# Altium PCB mb997.PcbDoc (part 1 of 4)
Units mil, origin at the board's own origin, x right, y up, seen from the top; angles counter-clockwise.
Board outline 2598.43 x 3818.9 mil, 2 copper layers (Top, Bottom), stack 62.402 mil thick; 189 components, 183 nets, 746 pads, 491 vias.
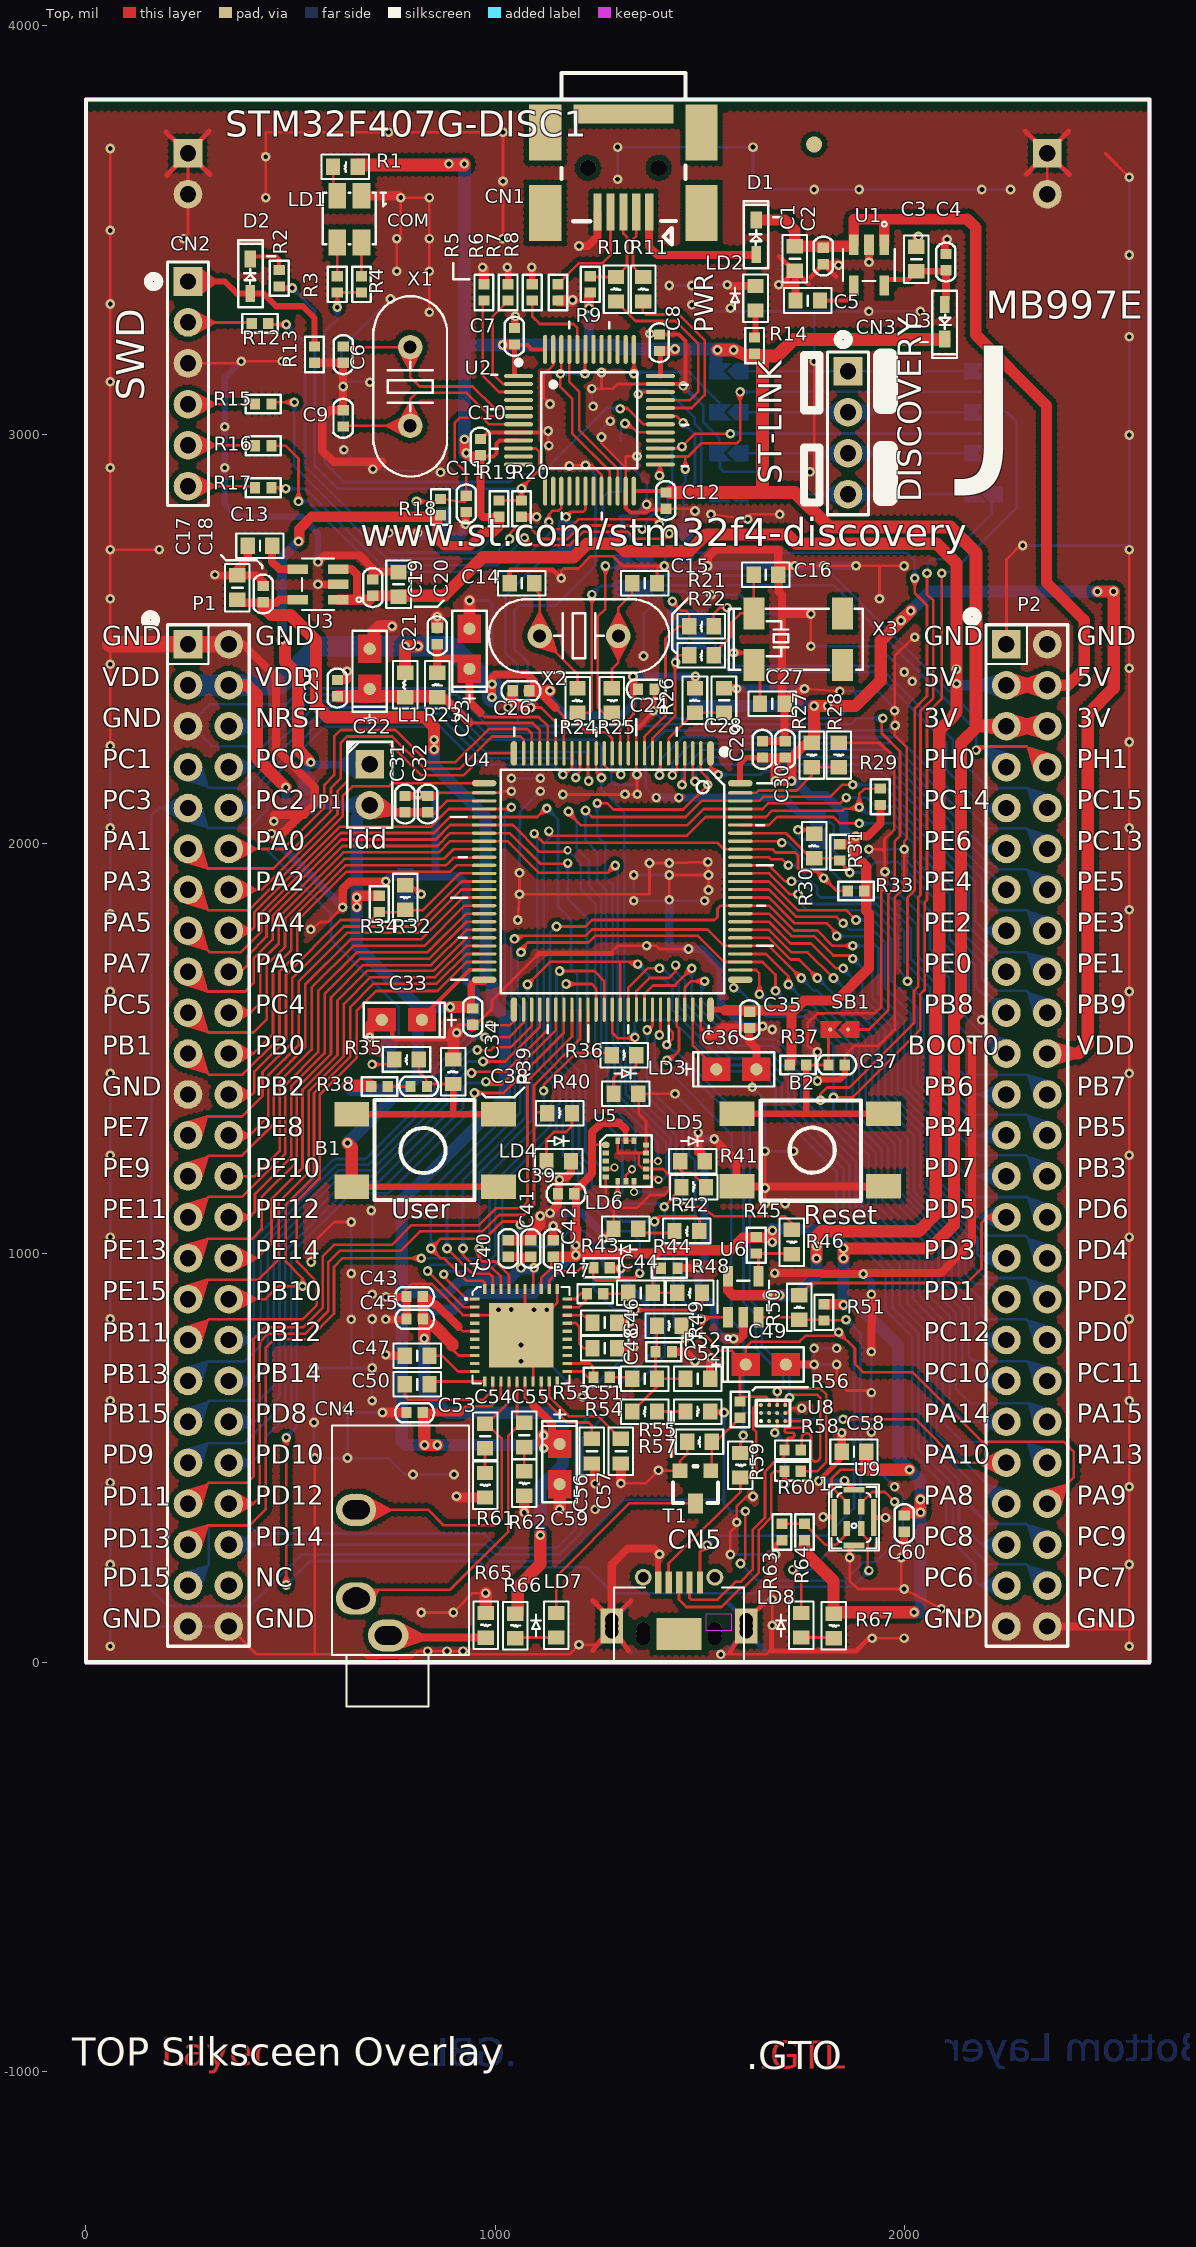
[diagram p0: Top view]
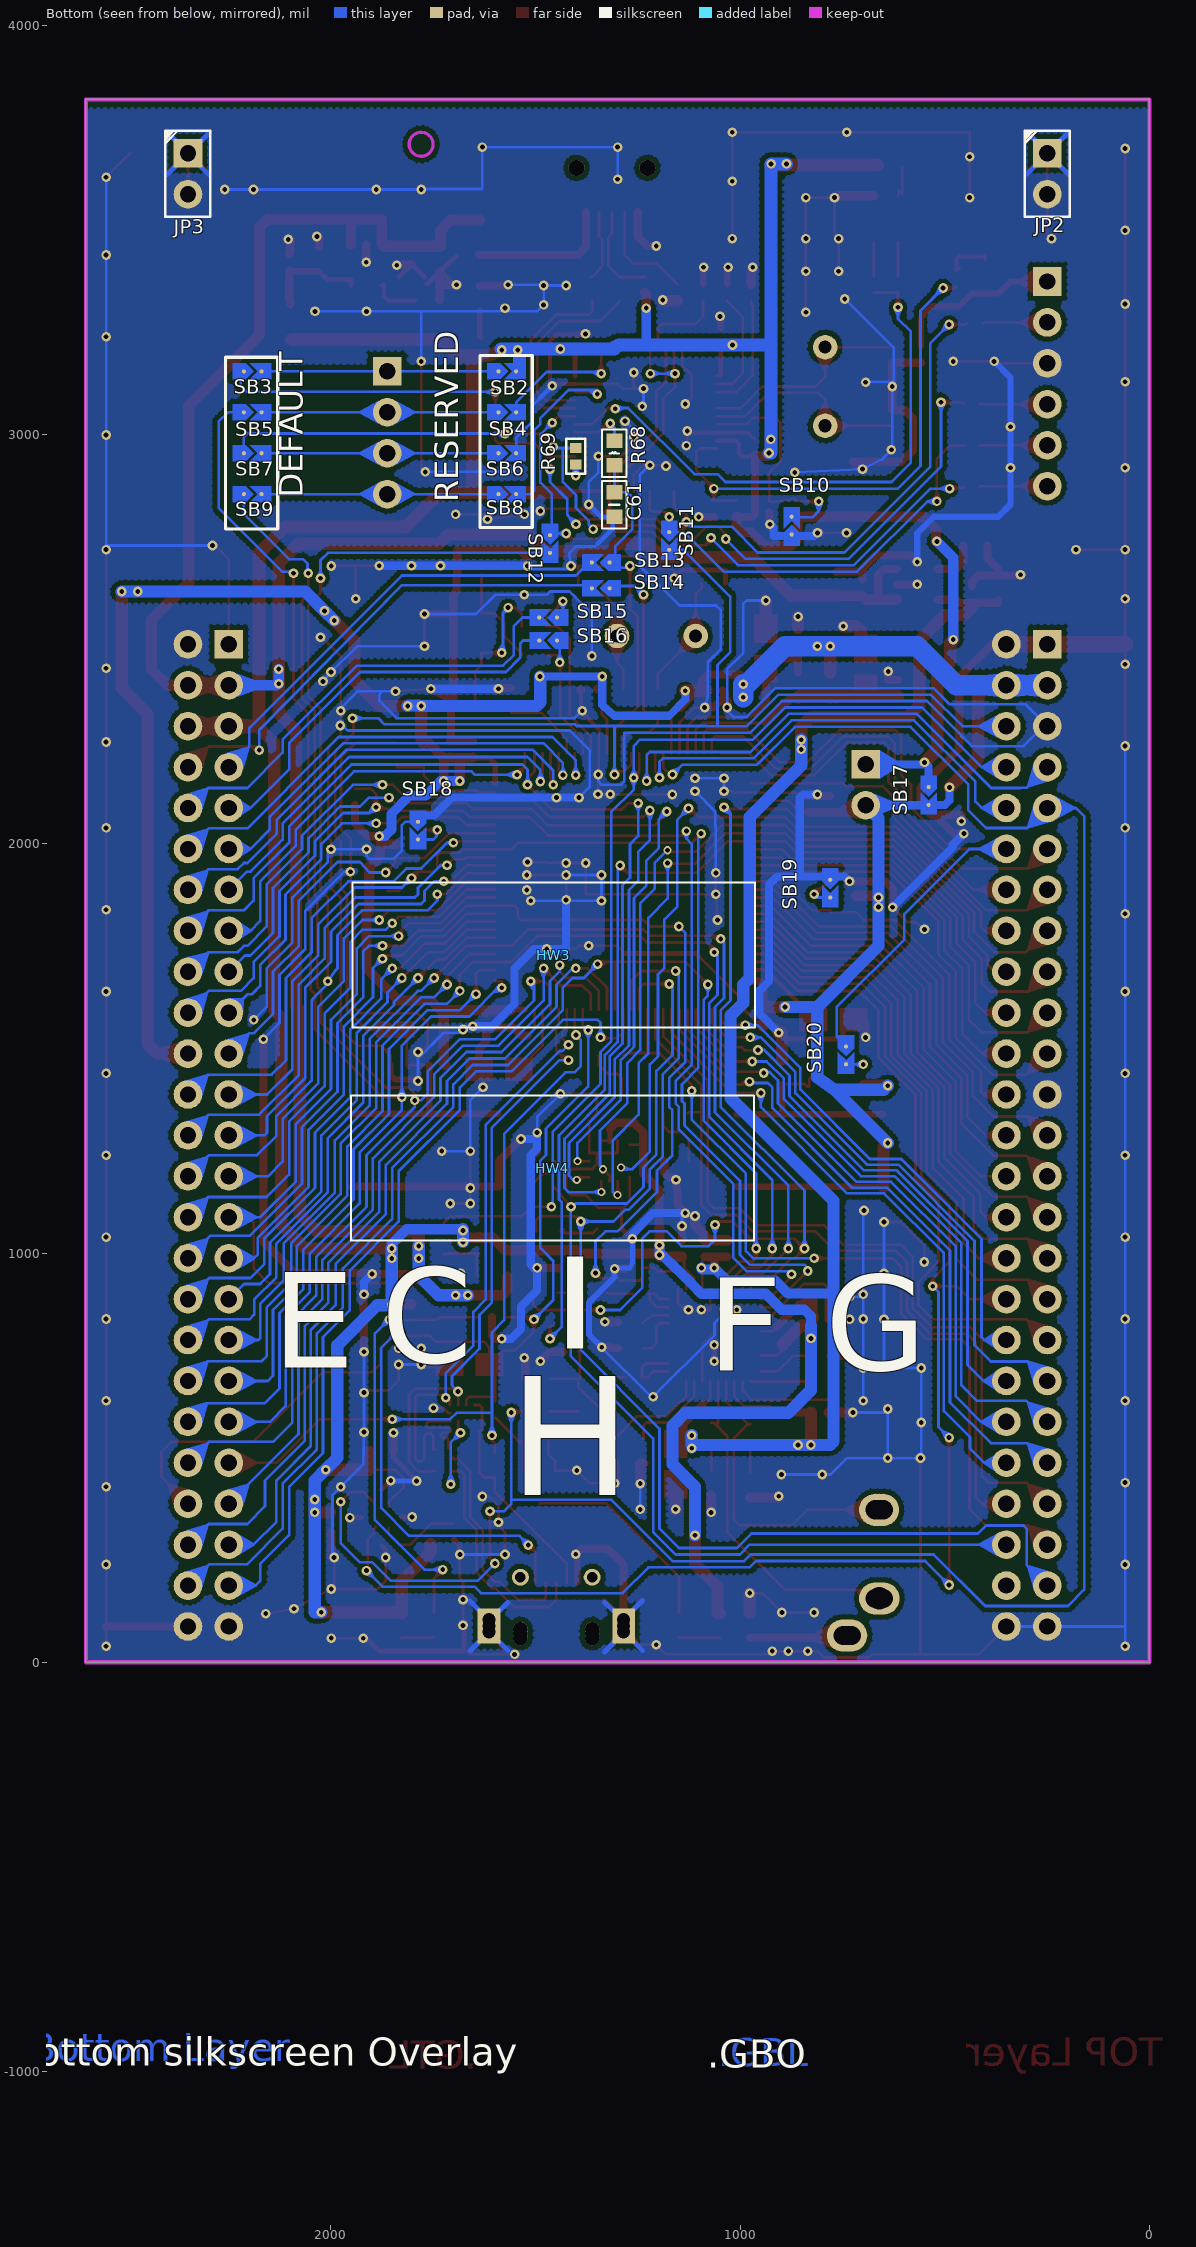
[diagram p1: Bottom view, seen from below]

## Layer stack, top to bottom
Solder Mask Top: solder mask 0.7874, Solder Resist, Dk 3.5
Top: signal copper 0.689
Dielectric 1: dielectric 61.0236, FR-4, Dk 4.2
Bottom: signal copper 0.689
Solder Mask Bottom: solder mask 0.7874, Solder Resist, Dk 3.5

## Board outline
0,0 2598.43,0 2598.43,3818.9 0,3818.9

## Design rules (kind name [scope] priority, off if disabled: settings)
Clearance Clearance_U5 [IsPad vs IsTrack] p1: gap=6 ignorepadtopadclearanceinfootprint=TRUE except(4.72: Arc-SMDPad Track-SMDPad; 10: Text-Text; 12: Arc-Fill Arc-Poly Arc-Region Track-Fill Track-Poly Track-Region SMDPad-Fill SMDPad-Poly SMDPad-Region THPad-Fill THPad-Poly THPad-Region Via-Fill Via-Poly Via-Region Fill-Fill Fill-Poly Fill-Region Poly-Poly Poly-Region Region-Region)
Clearance Clearance_CN5 [IsPad and ((Name = 'CN5-6') or (Name = 'CN5-6/2') or (Name = 'CN5-6/3') or (Name = 'CN5-6/4') or (Name = 'CN5-6/5') or (Name = 'CN5-6/6') or (Name = 'CN1-6') or (Name = 'CN1-7'))] p2: gap=6 ignorepadtopadclearanceinfootprint=TRUE except(5.98: Arc-Fill Arc-Poly Arc-Region Track-Fill Track-Poly Track-Region SMDPad-Fill SMDPad-Poly SMDPad-Region THPad-Fill THPad-Poly THPad-Region Via-Fill Via-Poly Via-Region Fill-Fill Fill-Poly Fill-Region Poly-Poly Poly-Region Region-Region; 10: Text-Text)
Clearance Clearance_JUMPER [HasFootprint('JUMPER') vs (HasFootprint('JUMPER') or IsTrack) and not InPolygon] p3: gap=6 ignorepadtopadclearanceinfootprint=FALSE except(5.91: Arc-Fill Arc-Poly Arc-Region Track-Fill Track-Poly Track-Region SMDPad-Fill SMDPad-Poly SMDPad-Region THPad-Fill THPad-Poly THPad-Region Via-Fill Via-Poly Via-Region Fill-Fill Fill-Poly Fill-Region Poly-Poly Poly-Region Region-Region; 10: Text-Text)
Clearance "Clearance - Default - DEFAULT- SMD" [IsVia vs IsSMTPin] p4 off: gap=6 ignorepadtopadclearanceinfootprint=FALSE
Clearance "Clearance - Default - DEFAULT - Via" [IsVia vs IsVia] p5 off: gap=6 ignorepadtopadclearanceinfootprint=FALSE
Clearance "Clearance - Default - DEFAULT - Net" [All] p6: gap=6 ignorepadtopadclearanceinfootprint=TRUE except(3.94: Arc-Arc Arc-Track Track-Track; 5.12: Arc-Via Track-Via; 9.84: Via-Fill Via-Poly Via-Region; 10: Text-Text; 11.81: Arc-Fill Arc-Poly Arc-Region Track-Fill Track-Poly Track-Region; 12: SMDPad-Fill SMDPad-Poly SMDPad-Region THPad-Fill THPad-Poly THPad-Region Fill-Fill Fill-Poly Fill-Region Poly-Poly Poly-Region Region-Region)
ComponentClearance "ComponentClearance - Default - DEFAULT" [All] p1: gap=6 collisioncheckmode=3 verticalgap=10 showdistances=FALSE
HoleToHoleClearance HoleToHoleClearance_CN5-6 [IsPad and ((Name = 'CN5-6') or (Name = 'CN5-6/2') or (Name = 'CN5-6/3') or (Name = 'CN5-6/4') or (Name = 'CN5-6/5') or (Name = 'CN5-6/6')) vs IsPad and ((Name = 'CN5-6') or (Name = 'CN5-6/2') or (Name = 'CN5-6/3') or (Name = 'CN5-6/4') or (Name = 'CN5-6/5') or (Name = 'CN5-6/6'))] p1: gap=0 allowstackedmicrovias=TRUE
HoleToHoleClearance HoleToHoleClearance_CN5-0 [IsPad and ((Name = 'CN5-0') or (Name = 'CN5-0/2') or (Name = 'CN5-0/6') or (Name = 'CN5-0/7') or (Name = 'CN5-0/8') or (Name = 'CN5-0/9') or (Name = 'CN5-0/11')) vs IsPad and ((Name = 'CN5-0') or (Name = 'CN5-0/2') or (Name = 'CN5-0/6') or (Name = 'CN5-0/7') or (Name = 'CN5-0/8') or (Name = 'CN5-0/9') or (Name = 'CN5-0/11'))] p2: gap=0 allowstackedmicrovias=TRUE
HoleToHoleClearance HoleToHoleClearance_CN4-3 [IsPad and ((Name = 'CN4-3') or (Name = 'CN4-3/2') or (Name = 'CN4-3/3')) vs IsPad and ((Name = 'CN4-3') or (Name = 'CN4-3/2') or (Name = 'CN4-3/3'))] p3: gap=0 allowstackedmicrovias=TRUE
HoleToHoleClearance HoleToHoleClearance_CN4-2 [IsPad and ((Name = 'CN4-2') or (Name = 'CN4-2/2') or (Name = 'CN4-2/3')) vs IsPad and ((Name = 'CN4-2') or (Name = 'CN4-2/2') or (Name = 'CN4-2/3'))] p4: gap=0 allowstackedmicrovias=TRUE
HoleToHoleClearance HoleToHoleClearance_CN4-1 [IsPad and ((Name = 'CN4-1') or (Name = 'CN4-1/2') or (Name = 'CN4-1/3')) vs IsPad and ((Name = 'CN4-1') or (Name = 'CN4-1/2') or (Name = 'CN4-1/3'))] p5: gap=0 allowstackedmicrovias=TRUE
HoleToHoleClearance "HoleToHoleClearance - Default - DEFAULT" [All] p6: gap=0 allowstackedmicrovias=TRUE
MaxMinImpedance "Default Impedance" [All] p1: minimum=50,00 maximum=150,0
MinimumSolderMaskSliver [All] p1: minsoldermaskwidth=3.94
PlaneConnect "Default PlaneConnect" [All] p1: planeconnectstyle=Relief reliefexpansion=20 reliefentries=4 reliefconductorwidth=11.81 reliefairgap=10
PolygonConnect PolygonConnect_Noyé [IsPad And (Layer = 'MultiLayer') And (PadShape_AllLayers = 'Round')] p1: connectstyle=Direct reliefconductorwidth=10 reliefentries=4 polygonreliefangle="90 Angle" airgapwidth=10
PolygonConnect "PolygonConnect - Default Pad" [All] p2: thpad.connectstyle=NoConnect thpad.reliefconductorwidth=11.81 thpad.reliefentries=4 thpad.polygonreliefangle="45 Angle" thpad.airgapwidth=12 smdpad.connectstyle=NoConnect smdpad.reliefconductorwidth=7.87 smdpad.reliefentries=4 smdpad.polygonreliefangle="45 Angle" smdpad.airgapwidth=12 via.connectstyle=Direct via.reliefconductorwidth=11.81 via.reliefentries=4 via.polygonreliefangle="45 Angle" via.airgapwidth=10
RoutingLayers "RoutingLayers - Default - DEFAULT" [All] p1: top layer_v5=TRUE bottom layer_v5=TRUE
RoutingPriority "RoutingPriority - Default - DEFAULT" [All] p1: routingpriority=3
RoutingTopology "Default Routing Topology" [All] p1: topology=Shortest
RoutingVias "RoutingVias - Default - DEFAULT" [All] p1: holewidth=11.81 width=23.62 viastyle="Through Hole" minholewidth=11.81 minwidth=23.62 maxholewidth=11.81 maxwidth=23.62
SMDToCorner "SMDToCorner - Default - DEFAULT" [All] p1: distance=0
ShortCircuit ShortCircuit_1 [IsPad and ((Name = 'CN5-6/2') or (Name = 'CN5-6/3') or (Name = 'CN5-6/5') or (Name = 'CN5-6') or (Name = 'CN5-6/4') or (Name = 'CN5-6/6')) vs IsPad and ((Name = 'CN5-6/2') or (Name = 'CN5-6/3') or (Name = 'CN5-6/5') or (Name = 'CN5-6') or (Name = 'CN5-6/4') or (Name = 'CN5-6/6'))] p1: allowed=TRUE
ShortCircuit ShortCircuit_CN5 [IsPad and ((Name = 'CN5-0') or (Name = 'CN5-0/2') or (Name = 'CN5-0/6') or (Name = 'CN5-0/7') or (Name = 'CN5-0/8') or (Name = 'CN5-0/9') or (Name = 'CN5-0/11')) vs IsPad and ((Name = 'CN5-0') or (Name = 'CN5-0/2') or (Name = 'CN5-0/6') or (Name = 'CN5-0/7') or (Name = 'CN5-0/8') or (Name = 'CN5-0/9') or (Name = 'CN5-0/11'))] p2: allowed=TRUE
ShortCircuit ShortCircuit_U7 [IsPad and (Name = 'U7-0') vs IsVia and (Net = 'GND')] p3: allowed=TRUE
ShortCircuit [All] p4: allowed=FALSE
SolderMaskExpansion SolderMaskExpansion_Via [IsVia] p1: expansion=-39.37 istentingtop=FALSE
SolderMaskExpansion "SolderMaskExpansion from CAM settings" [All] p2: expansion=2 istentingtop=FALSE
Width "Default Width" [All] p1: maxlimit=78.74 minlimit=6.5 preferedwidth=6.5
22 further rules are at their usual default settings.

## Classes and differential pairs
component class U_USB_OTG_FS: C49 CN5 LD7 LD8 R45 R46 R50 R51 R56 R57 R58 R59 R60 R66 R67 T1 U6 U8
component class U_STM32Fx: C14 C15 C16 C21 C22 C23 C24 C25 C26 C27 C28 C29 C30 C31 C32 C33 C34 C35 C36 L1 R21 R22 R23 R24 R25 R26 R27 R28 R29 R30 R31 R32 R33 R34 SB13 SB14 SB15 SB16 SB18 SB19 U4 X2 X3
component class U_ST_LINK: C1 C2 C3 C4 C5 C6 C7 C8 C9 C10 C11 C12 C13 C17 C18 C19 C20 C61 CN1 CN2 CN3 D1 D2 D3 JP1 JP2 JP3 LD1 LD2 R1 R2 R3 R4 R5 R6 R7 R8 R9 R10 R11 R12 R13 R14 R15 R16 R17 R18 R19 R20 R68 R69 SB2 SB3 SB4 SB5 SB6 SB7 SB8 SB9 SB10 SB11 SB12 SB17 U1 U2 U3 X1
component class "U_IO Peripherals": B1 B2 C37 C38 C39 LD3 LD4 LD5 LD6 R35 R36 R37 R38 R39 R40 R41 R42 SB1 SB20 U5
component class U_Audio: C40 C41 C42 C43 C44 C45 C46 C47 C48 C50 C51 C52 C53 C54 C55 C56 C57 C58 C59 C60 CN4 R43 R44 R47 R48 R49 R52 R53 R54 R55 R61 R62 R63 R64 R65 U7 U9
component class U_Top: HW3 HW4 P1 P2

## Components (designator, comment, footprint, x,y, rotation, side; value= is the part's Value field where it differs from the comment)
B1 "SW-PUSH-CMS" SW4SMD 825.21,1250.9 r180 top
B2 "SW-PUSH-CMS" SW4SMD 1773.21,1250.9 r0 top
C1 "1µF_X5R_0603" 0603C 1732.24,3429.96 r90 top value=1uF
C2 "100nF" 0402C 1801.71,3436.4 r90 top
C3 "1µF_X5R_0603" 0603C 2029.21,3428.9 r90 top value=1uF
C4 "100nF" 0402C 2101.71,3421.4 r270 top
C5 "10nF_X7R_0603" 0603C 1763.74,3327.6 r0 top value=10nF
C6 "20pF" 0402C 628.41,3195.5 r90 top
C7 "100nF" 0402C 1047.24,3240.16 r270 top
C8 "100nF" 0402C 1401.57,3224.41 r270 top
C9 "20pF" 0402C 628.41,3039.5 r270 top
C10 "100nF" 0402C 963.81,2969.3 r270 top
C11 "100nF" 0402C 929.13,2830.71 r90 top
C12 "100nF" 0402C 1417.32,2838.58 r270 top
C13 "10nF_X7R_0603" 0603C 425.2,2728.35 r0 top value=10nF
C14 "20pF" 0603C 1065.21,2636.9 r0 top
C15 "20pF" 0603C 1365.21,2636.9 r180 top
C16 "6.8pF" 0603C 1661.42,2657.48 r0 top
C17 "1µF_X5R_0603" 0603C 370.08,2625.98 r90 top value=1uF
C18 "100nF" 0402C 433.07,2610.24 r270 top
C19 "100nF" 0402C 700.79,2625.98 r270 top
C20 "1µF_X5R_0603" 0603C 763.78,2633.86 r270 top value=1uF
C21 "100nF" 0402C 858.27,2507.87 r270 top
C22 "1uF" CASE-A 693.22,2427.55 r90 top
C23 "1uF" CASE-A 937.01,2476.38 r90 top
C24 "100nF" 0402C 1369.21,2377.9 r0 top
C25 "100nF" 0402C 614.52,2380.33 r270 top
C26 "100nF" 0402C 1062.99,2374.02 r0 top
C27 "6.8pF" 0603C 1677.17,2342.52 r0 top
C28 "1uF" 0603C 1559.06,2350.39 r90 top
C29 "100nF" 0402C 1653.36,2230.8 r270 top
C30 "100nF" 0402C 1708.45,2230.8 r270 top
C31 "100nF" 0402C 779.79,2097.01 r270 top
C32 "100nF" 0402C 834.88,2097.01 r270 top
C33 "2.2uF" CASE-A 771.92,1569.72 r180 top
C34 "100nF" 0402C 945.06,1577.59 r90 top
C35 "100nF" 0402C 1621.88,1569.72 r270 top
C36 "2.2uF" CASE-A 1589.21,1448.9 r0 top
C37 "100nF" 0402C 1834.37,1459.54 r180 top
C38 "100nF" 0402C 813.21,1406.9 r180 top
C39 "100nF" 0402C 1173.29,1144.74 r0 top
C40 "0.1uF" 0402C 1031.63,1010.95 r270 top value=100nF
C41 "0.1uF" 0402C 1086.72,1010.95 r270 top value=100nF
C42 "0.1uF" 0402C 1141.81,1010.95 r270 top value=100nF
C43 "0.1uF" 0402C 803.15,893.7 r0 top value=100nF
C44 "1uF(X7R)" 0603C 1355.2,902.6 r0 top value=1uF
C45 "0.1uF" 0402C 803.31,838.89 r0 top value=100nF
C46 "150pF(COG)" 0603C 1267.73,829.94 r180 top value=150pF
C47 "1uF(X7R)" 0603C 809.21,748.9 r180 top value=1uF
C48 "150pF(COG)" 0603C 1267.73,766.98 r180 top value=150pF
C49 "4.7uF" CASE-A 1661.23,727.63 r0 top
C50 "1uF (X7R)" 0603C 809.21,678.9 r0 top value=1uF
C51 "1uF(X7R)" 0603C 1365.2,692.6 r0 top value=1uF
C52 "10nF" 0603C 1495.2,692.6 r0 top
C53 "0.1uF" 0402C 803.15,610.24 r0 top value=100nF
C54 "0.022uF" 0603C 975.2,552.6 r90 top
C55 "0.022uF" 0603C 1070.87,555.12 r90 top
C56 "1uF(X5R)" 0603C 1236.22,515.75 r90 top value=1uF
C57 "1uF(X5R)" 0603C 1307.09,515.75 r90 top value=1uF
C58 "10uF" 0603C 1876.71,514.12 r0 top
C59 "1uF" CASE-A 1157.48,484.25 r270 top
C60 "100nF" 0402C 1999.21,338.9 r90 top
C61 "20pF" 0603C 1307.08,2828.92 r270 bottom
CN1 "UBF-MINI5-03" USB-MINI-B-SMD-A_ 1313.35,3651.61 r0 top
CN2 "Header 6" HEADER6$2F$2.54 249.21,3374.02 r270 top
CN3 "Header 4" HEADER4$2F$2.54 1862.17,3154.37 r270 top
CN4 "ST-225-02" PCBCOMPONENT_1$2F$2_new_ 699.21,218.9 r90 top
CN5 "475900001" USB-MICRO-AB_new 1449.21,194.9 r90 top value=47590-0001
D1 "BAT60JFILM" SOD323$2F$A 1637.76,3524.45 r270 top
D2 "BAT60JFILM" SOD323$2F$A 401.57,3429.13 r270 top
D3 "BAT60JFILM" SOD323$2F$A 2098.39,3233.11 r90 top
HW3 "STICKER_BOARD_CPN" STICKER_25X9_ 1455.56,1727.98 r180 bottom
HW4 "STICKER_BOARD_REF" STICKER_25X9_ 1458.2,1207.41 r180 bottom
JP1 "" SIP2$2F$2.54 693.22,2144.23 r0 top
JP2 "" SIP2$2F$2.54 249.21,3637.4 r180 bottom
JP3 "" SIP2$2F$2.54 2349.21,3637.4 r180 bottom
L1 "fcm1608-0603" 0603L 779.79,2388.2 r270 top value=100uH
LD1 "LD_BICOLOR_CMS" AV02-0501EN 645.63,3528.39 r180 top
LD2 "RED" LED0603 1636.12,3333.17 r90 top
LD3 "Orange" LED0603 1319.21,1388.9 r0 top
LD4 "Green" LED0603 1155.21,1223.9 r0 top
LD5 "Red" LED0603 1482.21,1223.9 r0 top
LD6 "Blue" LED0603 1319.21,1058.9 r180 top
LD7 "Green" LED0603 1149.21,90.55 r90 top
LD8 "Red" LED0603 1748.03,90.55 r90 top
P1 "Header 25X2" HEAD25X2$2F$2.54 299.21,1287.4 r270 top
P2 "Header 25X2" HEAD25X2$2F$2.54 2299.21,1287.4 r270 top
R1 "0" 0603R 633.82,3654.37 r0 top
R2 "100" 0402R 472.44,3381.89 r270 top
R3 "100" 0402R 614.13,3366.97 r90 top
R4 "100" 0402R 673.19,3366.97 r90 top
R5 "10K" 0402R 972.4,3347.28 r270 top
R6 "10K" 0402R 1031.46,3347.28 r270 top
R7 "100K" 0402R 1090.51,3347.28 r270 top
R8 "100K" 0402R 1153.5,3347.28 r270 top
R9 "1K5" 0402R 1232.24,3366.97 r270 top
R10 "0" 0603R 1295.24,3355.16 r270 top
R11 "0" 0603R 1362.17,3355.16 r270 top
R12 "22" 0402R 425.2,3271.65 r0 top
R13 "10K" 0402R 558.21,3195.5 r270 top
R14 "1K" 0402R 1633.82,3217.36 r270 top
R15 "22" 0402R 433.07,3074.8 r0 top
R16 "22" 0402R 433.07,2972.44 r0 top
R17 "22" 0402R 433.07,2870.08 r0 top
R18 "100K" 0402R 866.14,2822.83 r270 top
R19 "4.7K" 0402R 1009.21,2818.9 r90 top
R20 "4.7K" 0402R 1064.09,2818.9 r90 top
R21 "0" 0603R 1503.94,2531.5 r0 top
R22 "0" 0603R 1503.94,2460.63 r0 top
R23 "47" 0603R 858.49,2388.2 r270 top
R24 "220" 0603R 1201.21,2349.9 r270 top
R25 "0" 0603R 1285.21,2349.9 r90 top
R26 "[N/A]" 0603R 1488.19,2350.39 r270 top value=0
R27 "[N/A]" 0603R 1773.21,2216.9 r90 top value=0
R28 "0" 0603R 1839.21,2216.9 r90 top
R29 "4.7K" 0402R 1941.21,2114.9 r90 top
R30 "510" 0603R 1779.28,1994.7 r270 top
R31 "10K" 0402R 1842.24,1978.96 r90 top
R32 "510" 0603R 779.79,1868.78 r90 top
R33 "4.7K" 0402R 1881.59,1884.52 r180 top
R34 "10K" 0402R 716.83,1853.04 r270 top
R35 "330" 0603R 783.21,1472.9 r0 top
R36 "680" 0603R 1314.95,1483.15 r180 top
R37 "1K5" 0402R 1739.93,1459.54 r180 top
R38 "100" 0402R 717.21,1406.9 r180 top
R39 "220K" 0603R 897.21,1442.9 r270 top
R40 "510" 0603R 1157.55,1341.49 r180 top
R41 "680" 0603R 1485.21,1160.9 r180 top
R42 "680" 0603R 1468.21,1053.9 r0 top
R43 "10K" 0402R 1259.86,963.73 r0 top
R44 "100K" 0402R 1425.2,962.6 r0 top
R45 "10K" 0402R 1637.62,1018.82 r270 top
R46 "0" 0603R 1724.19,1026.69 r90 top
R47 "100" 0402R 1244.12,900.77 r180 top
R48 "0" 0603R 1475.2,902.6 r0 top
R49 "0" 0603R 1425.13,822.07 r180 top
R50 "0" 0603R 1743.21,866.9 r270 top
R51 "47K" 0402R 1803.21,854.9 r270 top
R52 "100K" 0402R 1411.71,758.9 r0 top
R53 "100" 0402R 1259.86,696.15 r180 top
R54 "1.2K" 0603R 1365.2,612.6 r0 top
R55 "0" 0603R 1495.2,612.6 r180 top
R56 "47K" 0402R 1598.27,617.45 r90 top
R57 "[N/A]" 0603R 1499.21,538.9 r0 top value=1K
R58 "22" 0402R 1726.71,518.9 r0 top
R59 "0" 0603R 1599.21,481.4 r90 top
R60 "22" 0402R 1726.71,466.4 r0 top
R61 "51" 0603R 975.2,432.6 r90 top
R62 "51" 0603R 1070.87,437.01 r90 top
R63 "0" 0402R 1700.58,318.39 r90 top
R64 "0" 0402R 1755.67,318.39 r270 top
R65 "0" 0603R 976.54,90.16 r90 top
R66 "330" 0603R 1049.21,88.9 r90 top
R67 "620" 0603R 1827.64,88.9 r90 top
R68 "100" 0603R 1307.08,2954.84 r270 bottom
R69 "100" 0402R 1401.52,2946.97 r90 bottom
SB1 "Circuit Breaker" JUMPER 1842.24,1546.11 r180 top
SB2 "Circuit Breaker" JUMPER 1570.83,3154.37 r180 bottom
SB3 "Circuit Breaker" JUMPER 2192.87,3154.37 r180 bottom
SB4 "Circuit Breaker" JUMPER 1570.83,3054.37 r180 bottom
SB5 "Circuit Breaker" JUMPER 2192.87,3054.37 r180 bottom
SB6 "Circuit Breaker" JUMPER 1570.83,2954.37 r180 bottom
SB7 "Circuit Breaker" JUMPER 2192.87,2954.37 r180 bottom
SB8 "Circuit Breaker" JUMPER 1570.83,2854.37 r180 bottom
SB9 "Circuit Breaker" JUMPER 2192.87,2854.37 r180 bottom
SB10 "Circuit Breaker" JUMPER 874.02,2775.59 r90 bottom
SB11 "Circuit Breaker" JUMPER 1173.21,2741.9 r270 bottom
SB12 "Circuit Breaker" JUMPER 1464.48,2734.48 r270 bottom
SB13 "Circuit Breaker" JUMPER 1338.56,2687.26 r0 bottom
SB14 "Circuit Breaker" JUMPER 1338.56,2624.3 r0 bottom
SB15 "Circuit Breaker" JUMPER 1467.21,2552.9 r0 bottom
SB16 "Circuit Breaker" JUMPER 1467.21,2496.9 r0 bottom
SB17 "Circuit Breaker" JUMPER 539.21,2118.9 r270 bottom
SB18 "Circuit Breaker" JUMPER 1787.15,2034.05 r270 bottom
SB19 "Circuit Breaker" JUMPER 779.79,1892.39 r270 bottom
SB20 "Circuit Breaker" JUMPER 741.21,1484.9 r270 bottom
T1 "9013" SOT23 1489.21,428.9 r180 top value=MMBT9013
U1 "LD3985M33R" SOT-23-5L 1913.35,3414.21 r0 top
U2 "STM32F103CBT6" LQFP48$2F$0.5MM$5C$9X9B 1118.11,2862.2 r0 top
U3 "LD3985M25R" SOT-23-5L 566.93,2633.86 r270 top
U4 "STM32F407VGT6" QFP100-1414 1285.96,1907.95 r180 top
U5 "LIS3DSHTR" LGA16_ 1319.21,1224.8 r0 top
U6 "STMPS2141STR" SOT-23-5L 1606.14,892.9 r180 top
U7 "CS43L22_NEW" QFN40(6_6) 1063.11,798.9 r0 top
U8 "EMIF02-USB03F2" FLIPCHIP(11) 1679.21,608.9 r0 top
U9 "IMP34DT05TR" MIC_HCLGA_3X4X1_4LD_t 1876.71,353.34 r180 top
X1 "8MHz" HC-49A 792.21,3117.5 r90 top
X2 "8MHz" HC-49A 1204.72,2507.87 r0 top
X3 "MC306-G-06Q-32.768 (manufacturer JFVNY)" MC306-CRYSTAL 1740.16,2500 r0 top

## Footprints (in the part's own frame and the unit in brackets; to place one, negate y for a bottom-side part, rotate by r counter-clockwise, add the part's x,y. Pads: shape width x height; smd on the part's side, far side on the other; paste and mask are expansions set on the pad)
0402C [mil]
  rect 25x27.56 smd: 1(-20,0) 2(20,0)
  silkscreen extent -48,-24 47,23
0402R [mil]
  rect 25x27.56 smd: 1(-20,0) 2(20,0)
  silkscreen extent -43,-23 43,23
0603C [mil]
  rect 35x40 smd: 1(-30,0) 2(30,0)
  silkscreen extent -58,-30 58,30
0603L [mil]
  rect 35x40 smd: 1(-30,0) 2(30,0)
  silkscreen extent -58,-30 58,30
0603R [mil]
  rect 35x40 smd: 1(-30,0) 2(30,0)
  silkscreen extent -58,-30 58,30
AV02-0501EN [mm]
  rect 1.1x1.6 smd: 1(-0.7,-1.4) 2(-0.7,1.5) 3(0.8,1.5) 4(0.8,-1.4)
  silkscreen extent -2.2,-1.6 1.7,1.6
CASE-A [mil]
  round 30 smd: 1(-49,0) 2(49,0)
  Top region: -83,-28 -15,-28 -15,28 -83,28
  Top region: 15,-28 83,-28 83,28 15,28
  Top pour cut-out: -95.08,39.37 95.08,39.37 95.08,-39.96 -95.08,-39.96
  silkscreen extent -105,-42 93,42
FLIPCHIP(11) [mil]
  round 9.84 smd: A2(-29.53,0) A3(-29.53,19.69) B1(-9.84,-19.68) B2(-9.84,0) B3(-9.84,19.69) C1(9.84,-19.68) C2(9.84,0) C3(9.84,19.69) D1(29.53,-19.68) D2(29.53,0) D3(29.53,19.69)
  silkscreen extent -41,-31 41,31
HC-49A [mil]
  round 60 hole 32: 1(-96.06,0) 2(96.06,0)
  silkscreen extent -220,-90 220,90
HEAD25X2$2F$2.54 [mil]
  rect 70x70 hole 40: 1(-1200,-50)
  round 70 hole 40: 2(-1200,50) 3(-1100,-50) 4(-1100,50) 5(-1000,-50) 6(-1000,50) 7(-900,-50) 8(-900,50) 9(-800,-50) 10(-800,50) 11(-700,-50) 12(-700,50) 13(-600,-50) 14(-600,50) 15(-500,-50) 16(-500,50) 17(-400,-50) 18(-400,50) 19(-300,-50) 20(-300,50) 21(-200,-50) 22(-200,50) 23(-100,-50) 24(-100,50) 25(0,-50) 26(0,50) 27(100,-50) 28(100,50) 29(200,-50) 30(200,50) 31(300,-50) 32(300,50) 33(400,-50) 34(400,50) 35(500,-50) 36(500,50) 37(600,-50) 38(600,50) 39(700,-50) 40(700,50) 41(800,-50) 42(800,50) 43(900,-50) 44(900,50) 45(1000,-50) 46(1000,50) 47(1100,-50) 48(1100,50) 49(1200,-50) 50(1200,50)
  silkscreen extent -1248,-101 1248,100
HEADER4$2F$2.54 [mil]
  rect 70x70 hole 40: 1(0,0)
  round 70 hole 40: 2(100,0) 3(200,0) 4(300,0)
  silkscreen extent -48,-50 350,50
HEADER6$2F$2.54 [mil]
  rect 70x70 hole 40: 1(0,0)
  round 70 hole 40: 2(100,0) 3(200,0) 4(300,0) 5(400,0) 6(500,0)
  silkscreen extent -48,-50 548,50
JUMPER [mil]
  round 10 smd: 1(-19.68,0) 2(23.62,0)
  Top region: -47.24,-19.69 -47.24,19.68 -15.75,19.68 3.94,0 -15.75,-19.69
  Top region: -5.91,19.68 13.78,0 -5.91,-19.69 47.24,-19.69 47.24,19.68
  Top pour cut-out: -59.06,31.5 59.06,31.5 59.06,-31.5 -59.06,-31.5
LED0603 [mil]
  rect 35x40 smd: 1(-30,0) 2(30,0)
  silkscreen extent -58,-30 58,62
LGA16_ [mm]
  oval 0.5x0.4 smd paste-0.05 mask-0.05: 1(-1.25,1)
  rect 0.4x0.3 smd: 2(-1.25,0.5) 3(-1.25,0) 4(-1.25,-0.5) 5(-1.25,-1) 9(1.25,-1) 10(1.25,-0.5) 11(1.25,0) 12(1.25,0.5) 13(1.25,1)
  rect 0.3x0.4 smd: 6(-0.5,-1.25) 7(0,-1.25) 8(0.5,-1.25) 14(0.5,1.25) 15(0,1.25) 16(-0.5,1.25)
  silkscreen extent -1.6,-1.6 1.6,1.6
LQFP48$2F$0.5MM$5C$9X9B [mil]
  oval 71x10.13 smd: 1(-61,281.06) 12(-61,64.52) 25(285.46,64.53) 36(285.46,281.06)
  oval 71x10 smd: 2(-61,261.38) 3(-61,241.69) 4(-61,222.01) 5(-61,202.32) 6(-61,182.64) 7(-61,162.95) 8(-61,143.27) 9(-61,123.58) 10(-61,103.9) 11(-61,84.21) 26(285.46,84.21) 27(285.46,103.9) 28(285.46,123.58) 29(285.46,143.27) 30(285.46,162.95) 31(285.46,182.64) 32(285.46,202.32) 33(285.46,222.01) 34(285.46,241.69) 35(285.46,261.38)
  oval 10.13x71 smd: 13(3.96,-0.43) 24(220.5,-0.43) 37(220.5,346.02) 48(3.96,346.02)
  oval 10x71 smd: 14(23.65,-0.43) 15(43.33,-0.43) 16(63.02,-0.43) 17(82.7,-0.43) 18(102.39,-0.43) 19(122.07,-0.43) 20(141.76,-0.43) 21(161.44,-0.43) 22(181.13,-0.43) 23(200.81,-0.43) 38(200.81,346.02) 39(181.13,346.02) 40(161.44,346.02) 41(141.76,346.02) 42(122.07,346.02) 43(102.39,346.02) 44(82.7,346.02) 45(63.02,346.02) 46(43.33,346.02) 47(23.65,346.02)
  silkscreen extent -129,-69 354,414
MC306-CRYSTAL [mm]
  rect 1.3x2 smd: 1(-2.75,-1.6) 2(2.75,-1.6) 3(2.75,1.6) 4(-2.75,1.6)
  silkscreen extent -4.3,-1.9 4,1.9
MIC_HCLGA_3X4X1_4LD_t [mm]
  rect 0.4x0.95 smd paste+0 mask+0.05: 1(0.45,-0.675) 2(0.45,0.675) 3(-0.45,0.675) 4(-0.45,-0.675)
  rect 0.35x2.3 smd paste+0 mask+0.05: 5(-1.225,0) 5(1.225,0)
  rect 1.3x0.35 smd paste+0 mask+0.05: 5(0,1.725) 5(0,-1.725)
  silkscreen extent -1.55,-2.05 1.55,2.05, body extent -1.45,-1.95 1.45,1.95, height 1.03
PCBCOMPONENT_1$2F$2_new_ [mm]
  round 2 hole 1.2: 1(-3.9,-1.254) 1(-3.9,-1) 1(-3.9,-0.746) 2(-1.6,0.746) 2(-1.6,1.254) 3(3.9,0.746) 3(3.9,1) 3(3.9,1.235)
  round 2 hole 1.4: 2(-1.6,1)
  silkscreen extent -8.31,-6 9.15,2.5
QFN40(6_6) [mm]
  rect 4x4 smd: 0(0,0)
  rect 0.6x0.2 smd: 1(-2.87,2.25) 2(-2.87,1.75) 3(-2.87,1.25) 4(-2.87,0.75) 5(-2.87,0.25) 6(-2.87,-0.25) 7(-2.87,-0.75) 8(-2.87,-1.25) 9(-2.87,-1.75) 10(-2.87,-2.25) 21(2.87,-2.25) 22(2.87,-1.75) 23(2.87,-1.25) 24(2.87,-0.75) 25(2.87,-0.25) 26(2.87,0.25) 27(2.87,0.75) 28(2.87,1.25) 29(2.87,1.75) 30(2.87,2.25)
  rect 0.2x0.6 smd: 11(-2.25,-2.87) 12(-1.75,-2.87) 13(-1.25,-2.87) 14(-0.75,-2.87) 15(-0.25,-2.87) 16(0.25,-2.87) 17(0.75,-2.87) 18(1.25,-2.87) 19(1.75,-2.87) 20(2.25,-2.87) 31(2.25,2.87) 32(1.75,2.87) 33(1.25,2.87) 34(0.75,2.87) 35(0.25,2.87) 36(-0.25,2.87) 37(-0.75,2.87) 38(-1.25,2.87) 39(-1.75,2.87) 40(-2.25,2.87)
  silkscreen extent -3.48,-3 3,3
QFP100-1414 [mil]
  oval 16x60 smd: 1(-240.16,-312.99) 25(240.16,-312.99) 51(240.16,312.99) 75(-240.16,312.99)
  oval 8x60 smd: 2(-216.54,-312.99) 3(-196.85,-312.99) 4(-177.17,-312.99) 5(-157.48,-312.99) 6(-137.8,-312.99) 7(-118.11,-312.99) 8(-98.43,-312.99) 9(-78.74,-312.99) 10(-59.06,-312.99) 11(-39.37,-312.99) 12(-19.68,-312.99) 13(0,-312.99) 14(19.68,-312.99) 15(39.37,-312.99) 16(59.06,-312.99) 17(78.74,-312.99) 18(98.43,-312.99) 19(118.11,-312.99) 20(137.8,-312.99) 21(157.48,-312.99) 22(177.17,-312.99) 23(196.85,-312.99) 24(216.54,-312.99) 52(216.54,312.99) 53(196.85,312.99) 54(177.17,312.99) 55(157.48,312.99) 56(137.8,312.99) 57(118.11,312.99) 58(98.43,312.99) 59(78.74,312.99) 60(59.06,312.99) 61(39.37,312.99) 62(19.68,312.99) 63(0,312.99) 64(-19.68,312.99) 65(-39.37,312.99) 66(-59.06,312.99) 67(-78.74,312.99) 68(-98.43,312.99) 69(-118.11,312.99) 70(-137.8,312.99) 71(-157.48,312.99) 72(-177.17,312.99) 73(-196.85,312.99) 74(-216.54,312.99)
  oval 60x16 smd: 26(312.99,-240.16) 50(312.99,240.16) 76(-312.99,240.16) 100(-312.99,-240.16)
  oval 60x8 smd: 27(312.99,-216.54) 28(312.99,-196.85) 29(312.99,-177.17) 30(312.99,-157.48) 31(312.99,-137.8) 32(312.99,-118.11) 33(312.99,-98.43) 34(312.99,-78.74) 35(312.99,-59.06) 36(312.99,-39.37) 37(312.99,-19.69) 38(312.99,0) 39(312.99,19.68) 40(312.99,39.37) 41(312.99,59.06) 42(312.99,78.74) 43(312.99,98.43) 44(312.99,118.11) 45(312.99,137.8) 46(312.99,157.48) 47(312.99,177.17) 48(312.99,196.85) 49(312.99,216.54) 77(-312.99,216.54) 78(-312.99,196.85) 79(-312.99,177.17) 80(-312.99,157.48) 81(-312.99,137.8) 82(-312.99,118.11) 83(-312.99,98.43) 84(-312.99,78.74) 85(-312.99,59.06) 86(-312.99,39.37) 87(-312.99,19.68) 88(-312.99,0) 89(-312.99,-19.69) 90(-312.99,-39.37) 91(-312.99,-59.06) 92(-312.99,-78.74) 93(-312.99,-98.43) 94(-312.99,-118.11) 95(-312.99,-137.8) 96(-312.99,-157.48) 97(-312.99,-177.17) 98(-312.99,-196.85) 99(-312.99,-216.54)
  silkscreen extent -393,-396 394,392
SIP2$2F$2.54 [mil]
  rect 70x70 / inner round 70 / far side rect 70x70 hole 40: 1(0,50)
  round 70 hole 40: 2(0,-50)
  silkscreen extent -55,-105 55,105
SOD323$2F$A [mm]
  rect 1.06x0.6 smd: 1(2.14,0)
  rect 1.06x0.7 smd: 2(0,0)
  silkscreen extent -1.17,-0.76 3,0.76
SOT23 [mil]
  rect 36x36 smd: 1(-37.5,-39) 2(37.5,-39)
  rect 36x50 smd: 3(0,41)
  silkscreen extent -55,-50 55,40
SOT-23-5L [mil]
  rect 23.62x50 smd: 1(37.4,50) 2(0,50) 3(-37.4,50) 4(-37.4,-50) 5(37.4,-50)
  silkscreen extent -63,-39 63,106
STICKER_25X9_ [mil] "Sticker 25mm x 9mm"
  silkscreen extent -492,-177 492,177
SW4SMD [mil]
  rect 85x60 smd: 1(175.59,-88.19) 2(-182.68,-88.19) 3(175.59,88.98) 4(-182.68,88.98)
  silkscreen extent -124,-123 121,122
USB-MICRO-AB_new [mm]
  round 1.4 hole 0.83: 0(-3.055,4.175) 0(-3.055,-4.175) 0(-2.7,4.175) 0(-2.7,-4.175) 0(-2.315,4.175) 0(-2.315,-4.175)
  rect 2.2x1.4 hole 0.83: 0(-2.7,4.175) 0(-2.7,-4.175)
  round 1.05 hole 0.65: 0/3(0.325,-2.225) 0/4(0.325,2.225)
  rect 2x2.8 smd: 0/5(-3.2,0)
  rect 1.35x0.4 smd: 1(0,-1.3) 2(0,-0.65) 3(0,0) 4(0,0.65) 5(0,1.3)
  round 0.9 hole 0.9 unplated: 6(-2.9,-2.225) 6/2(-3.175,2.225) 6/3(-2.9,2.225) 6/4(-3.45,-2.225) 6/5(-3.45,2.225) 6/6(-3.175,-2.225)
  silkscreen extent -4.9,-4.03 -0.3,4.03
USB-MINI-B-SMD-A_ [mm]
  rect 0.508x2.3 smd: 1(1.597,-2.75) 2(0.797,-2.75) 3(-0.003,-2.75) 4(-0.803,-2.75) 5(-1.603,-2.75)
  round 1 hole 1 unplated: 6(2.194,0) 7(-2.2,0)
  rect 2x3.5 smd: 8(-4.853,-2.8) 9(4.847,-2.8) 10(4.847,2.2) 11(-4.853,2.2)
  rect 6.2x1.2 smd: 12(0,3.35)
  silkscreen extent -3.85,-4.76 3.85,5.9

## Part data
B1: library part SW-PUSH-CMS_NEW, "Non-Open Push-Button 0.1A 24V", Manuf_1=CHAU-HUA, Manuf_Part_1=CTSM-644B-V-T/R, cap_dec=---
B2: library part SW-PUSH-CMS_NEW, "Non-Open Push-Button 0.1A 24V", Manuf_1=CHAU-HUA, Manuf_Part_1=CTSM-644N-V-T/R, cap_dec=---
C1 C3 C17 C20: library part "CAP SMD 0603  X5R 1µF 25V 10%", "0603  X5R 1µF", Manuf_1=YAGEO, Manuf_Part_1=CC0603KRX5R7BB105, Rated voltage=25V, Temperature Max=+125°C, Temperature Min=-55°C, Tolerance=10%, Order code Farnell=1288202RL, Technology=X5R
C2 C4 C7 C8 C10 C11 C12 C18 C19 C21 C24 C25 C26 C29 C30 C31 C32 C34 C35: library part Cap, "Capacitor", Manuf_1=YAGEO, Manuf_Part_1=CC0402KRX7R7BB104, Published=8-Jun-2000, Publisher="Altium Limited", Revision="July-2002: Re-released for DXP Platform."
C5 C13: library part "CAP SMD 0603  X7R 10000PF 50V 10%", "0603  X7R 10NF", Manuf_1=YAGEO, Manuf_Part_1=CC0603KRX7R9BB103, Rated voltage=50V, Temperature Max=+125°C, Temperature Min=-55°C, Tolerance=10%, Order code Farnell=7569548RL, Order code RS=2040779, Technology=X7R
C6 C9: library part Cap, "Capacitor", Manuf_1=YAGEO, Manuf_Part_1=CC0402JRNPO9BN200, Published=8-Jun-2000, Publisher="Altium Limited", Revision="July-2002: Re-released for DXP Platform."
C14 C15: library part CAP, "Capacitor", Manuf_1=YAGEO, Manuf_Part_1=CC0603JRNPO9BN200
C16 C27 C38: library part CAP, "Capacitor", Fitted=NO
  C38: Published=8-Jun-2000, Publisher="Altium Limited", Revision="July-2002: Re-released for DXP Platform."
C22 C23 C59: library part "Cap Pol1", "Polarized Capacitor (Radial)", Manuf_1=AVX, Manuf_Part_1=TAJA105K016R, Published=8-Jun-2000, Publisher="Altium Limited", Revision="July-2002: Re-released for DXP Platform."
C28 C44 C47 C50 C51 C56 C57: library part CAP, "Capacitor", Manuf_1=YAGEO, Manuf_Part_1=CC0603KRX5R7BB105
  C44 C47 C50 C51 C56 C57: Published=8-Jun-2000, Publisher="Altium Limited", Revision="July-2002: Re-released for DXP Platform."
C33 C36: library part "Cap Low ESR", "Low ESR Ceramic Capacitor (X7R)", Manuf_1=YAGEO, Manuf_Part_1=CC1206KKX7R7BB225, Distrib=www.yageo.com, Order=CC1206KKX7R7BB225, Published=8-Jun-2000, Publisher="Altium Limited", Revision="July-2002: Re-released for DXP Platform."
C37 C39 C40 C41 C42 C43 C45 C53 C60: library part CAP, "Capacitor", Manuf_1=YAGEO, Manuf_Part_1=CC0402KRX7R7BB104
  C37 C40 C41 C42 C43 C45 C53 C60: Published=8-Jun-2000, Publisher="Altium Limited", Revision="July-2002: Re-released for DXP Platform."
C46 C48: library part CAP, "Capacitor", Manuf_1=YAGEO, Manuf_Part_1=CC0603JRNPO9BN151, Published=8-Jun-2000, Publisher="Altium Limited", Revision="July-2002: Re-released for DXP Platform."
C49: library part "Cap Pol1", "Polarized Capacitor (Radial)", Manuf_1=AVX, Manuf_Part_1=TAJA475K016R, Published=8-Jun-2000, Publisher="Altium Limited", Revision="July-2002: Re-released for DXP Platform."
C52: library part CAP, "Capacitor", Manuf_1=YAGEO, Manuf_Part_1=CC0603KRX7R9BB103, Published=8-Jun-2000, Publisher="Altium Limited", Revision="July-2002: Re-released for DXP Platform."
C54 C55: library part CAP, "Capacitor", Manuf_1=YAGEO, Manuf_Part_1=CC0603KRX7R9BB223, Published=8-Jun-2000, Publisher="Altium Limited", Revision="July-2002: Re-released for DXP Platform."
C58: library part CAP, "Capacitor", Manuf_1=YAGEO, Manuf_Part_1=CC0603KRX5R5BB106, Published=8-Jun-2000, Publisher="Altium Limited", Revision="July-2002: Re-released for DXP Platform."
C61: library part Cap, "Capacitor", Fitted=NO, Published=8-Jun-2000, Publisher="Altium Limited", Revision="July-2002: Re-released for DXP Platform."
CN1: library part "USB-MINI-typeB connector_", Manuf_1=MTCONN, Manuf_Part_1=UBF-MINI5-03
CN2: "Header, 6-Pin", Manuf_1=LWCONN, Manuf_Part_1=313140S212116, LatestRevisionDate=17-Jul-2002, LatestRevisionNote="Re-released for DXP Platform.", Publisher="Altium Limited"
CN3: "Header, 4-Pin", Manuf_1=LWCONN, Manuf_Part_1=313140S212116, Publisher="Altium Limited", Revision="17-Jul-2002: Re-released for DXP Platform."
CN4: library part ST-225-02_, "Connector Jack 35mm", Manuf_1="XIEJIA Electronics", Manuf_Part_1=ST-225-02, Order=ST-225-02
CN5: library part 475900001_, Manuf_1=Molex, Manuf_Part_1=47590-0001
D1 D2 D3: Manuf_1=STM, Code - JEDEC=DO-214-AB, Manuf_Part_1=BAT60JFILM, Order=BAT60JFILM, Provided=ST, Published=8-Jun-2000, Publisher="Altium Limited", Revision="July-2002: Re-released for DXP Platform."
JP1: library part JP2, Manuf_1=LWCONN, Manuf_Part_1=313140S212116
JP2 JP3: library part JP2, Manuf_1=LWCONN, Manuf_Part_1=313140S212145
L1: library part Inductor, "Inductor", Manuf_1=Tai-tech, Manuf_Part_1=FCM1608KF-601T03, Published=8-Jun-2000, Publisher="Altium Limited", Revision="July-2002: Re-released for DXP Platform."
LD1: "Bicolor Led", Manuf_1="Avago Technologies", Manuf_Part_1=HSMF-A201-A00J1, cap_dec=----, Distrib=RADIOSPARES, Ref St=xxxxxx, support=----
LD2: library part PHOTO, Manuf_1=EVERLIGHT, Manuf_Part_1=19-213-R6C-AP1Q2B-3T
LD3: library part LED2, "Typical RED, GREEN, YELLOW, AMBER GaAs LED", Manuf_1=EVERLIGHT, Manuf_Part_1=19-217/S2C-AM2N2VY/3T, Published=8-Jun-2000, Publisher="Altium Limited", Revision="July-2002: Re-released for DXP Platform."
LD4 LD7: library part LED2, "Typical RED, GREEN, YELLOW, AMBER GaAs LED", Manuf_1=EVERLIGHT, Manuf_Part_1=19-213SY6C/S530-E2/TR8LED, Published=8-Jun-2000, Publisher="Altium Limited", Revision="July-2002: Re-released for DXP Platform."
LD5 LD8: library part LED2, "Typical RED, GREEN, YELLOW, AMBER GaAs LED", Manuf_1=EVERLIGHT, Manuf_Part_1=19-213-R6C-AP1Q2B-3T, Published=8-Jun-2000, Publisher="Altium Limited", Revision="July-2002: Re-released for DXP Platform."
LD6: library part LED2, "Typical RED, GREEN, YELLOW, AMBER GaAs LED", Manuf_1=EVERLIGHT, Manuf_Part_1=19-217/BHC-ZL1M2RY/3T, Published=8-Jun-2000, Publisher="Altium Limited", Revision="July-2002: Re-released for DXP Platform."
P1 P2: "Header, 25-Pin, Dual row", Manuf_1=LWCONN, Manuf_Part_1=313250S212145, LatestRevisionDate=17-Jul-2002, LatestRevisionNote="Re-released for DXP Platform.", Publisher="Altium Limited"
R1 R10 R11 R26 R48 R49 R55 R65: library part res1, "Resistor", Manuf_1=YAGEO, Manuf_Part_1=RC0603JR-070RL, Published=8-Jun-2000, Publisher="Altium Limited", Revision="July-2002: Re-released for DXP Platform."
  R26 R49: Fitted=NO
R2 R57 R64: library part res1, "Resistor", Fitted=NO, Published=8-Jun-2000, Publisher="Altium Limited", Revision="July-2002: Re-released for DXP Platform."
R3 R4 R38 R47 R53 R69: library part res1, "Resistor", Manuf_1=YAGEO, Manuf_Part_1=RC0402FR-07100RL, Published=8-Jun-2000, Publisher="Altium Limited", Revision="July-2002: Re-released for DXP Platform."
R5 R6 R13 R31 R34 R43 R45: library part res1, "Resistor", Manuf_1=YAGEO, Manuf_Part_1=RC0402FR-0710KL, Published=8-Jun-2000, Publisher="Altium Limited", Revision="July-2002: Re-released for DXP Platform."
  R5 R31: Fitted=NO
R7 R8 R18 R44 R52: library part res1, "Resistor", Manuf_1=YAGEO, Manuf_Part_1=RC0402FR-07100KL, Published=8-Jun-2000, Publisher="Altium Limited", Revision="July-2002: Re-released for DXP Platform."
R9 R37: library part res1, "Resistor", Manuf_1=YAGEO, Manuf_Part_1=RC0402FR-071K5L, Published=8-Jun-2000, Publisher="Altium Limited", Revision="July-2002: Re-released for DXP Platform."
  R37: Fitted=NO
R12 R15 R16 R17: library part res1, "Resistor", Manuf_1=YAGEO, Manuf_Part_1=RC0402FR-0722RL, Published=8-Jun-2000, Publisher="Altium Limited", Revision="July-2002: Re-released for DXP Platform."
R14: library part res1, "Resistor", Manuf_1=YAGEO, Manuf_Part_1=RC0402FR-071KL, Published=8-Jun-2000, Publisher="Altium Limited", Revision="July-2002: Re-released for DXP Platform."
R19 R20 R29 R33: library part res1, "Resistor", Manuf_1=YAGEO, Manuf_Part_1=RC0402FR-074K7L, Published=8-Jun-2000, Publisher="Altium Limited", Revision="July-2002: Re-released for DXP Platform."
R21 R22 R27: library part Res1, "Resistor", Fitted=NO, Published=8-Jun-2000, Publisher="Altium Limited", Revision="July-2002: Re-released for DXP Platform."
R23: library part Res1, "Resistor", Manuf_1=YAGEO, Manuf_Part_1=RC0603FR-0747RL, Published=8-Jun-2000, Publisher="Altium Limited", Revision="July-2002: Re-released for DXP Platform."
R24: library part Res1, "Resistor", Manuf_1=YAGEO, Manuf_Part_1=RC0603FR-07220RL, Published=8-Jun-2000, Publisher="Altium Limited", Revision="July-2002: Re-released for DXP Platform."
R25 R28 R46 R50 R59: library part Res1, "Resistor", Manuf_1=YAGEO, Manuf_Part_1=RC0603JR-070RL, Published=8-Jun-2000, Publisher="Altium Limited", Revision="July-2002: Re-released for DXP Platform."
  R25: Fitted=NO
R30 R40: library part Res1, "Resistor", Manuf_1=YAGEO, Manuf_Part_1=RC0603FR-07510RL, Published=8-Jun-2000, Publisher="Altium Limited", Revision="July-2002: Re-released for DXP Platform."
R32: library part res1, "Resistor", Manuf_1=YAGEO, Manuf_Part_1=RC0603FR-07510RL, Published=8-Jun-2000, Publisher="Altium Limited", Revision="July-2002: Re-released for DXP Platform."
R35 R66: library part res1, "Resistor", Manuf_1=YAGEO, Manuf_Part_1=RC0603FR-07330RL, Published=8-Jun-2000, Publisher="Altium Limited", Revision="July-2002: Re-released for DXP Platform."
R36 R41 R42: library part Res1, "Resistor", Manuf_1=YAGEO, Manuf_Part_1=RC0603FR-07680RL, Published=8-Jun-2000, Publisher="Altium Limited", Revision="July-2002: Re-released for DXP Platform."
R39: library part res1, "Resistor", Manuf_1=YAGEO, Manuf_Part_1=RC0603FR-07220KL, Published=8-Jun-2000, Publisher="Altium Limited", Revision="July-2002: Re-released for DXP Platform."
R51 R56: library part res1, "Resistor", Manuf_1=YAGEO, Manuf_Part_1=RC0402FR-0747KL, Published=8-Jun-2000, Publisher="Altium Limited", Revision="July-2002: Re-released for DXP Platform."
R54: library part res1, "Resistor", Manuf_1=YAGEO, Manuf_Part_1=RC0603FR-071K2L, Published=8-Jun-2000, Publisher="Altium Limited", Revision="July-2002: Re-released for DXP Platform."
R58 R60: library part Res1, "Resistor", Manuf_1=YAGEO, Manuf_Part_1=RC0402FR-0722RL, Published=8-Jun-2000, Publisher="Altium Limited", Revision="July-2002: Re-released for DXP Platform."
R61 R62: library part res1, "Resistor", Manuf_1=YAGEO, Manuf_Part_1=RC0603FR-0751RL, Published=8-Jun-2000, Publisher="Altium Limited", Revision="July-2002: Re-released for DXP Platform."
R63: library part res1, "Resistor", Manuf_1=YAGEO, Manuf_Part_1=RC0402JR-070RL, Published=8-Jun-2000, Publisher="Altium Limited", Revision="July-2002: Re-released for DXP Platform."
R67: library part Res1, "Resistor", Manuf_1=YAGEO, Manuf_Part_1=RC0603FR-07620RL, Published=8-Jun-2000, Publisher="Altium Limited", Revision="July-2002: Re-released for DXP Platform."
R68: library part res1, "Resistor", Manuf_1=YAGEO, Manuf_Part_1=RC0603FR-07100RL, Published=8-Jun-2000, Publisher="Altium Limited", Revision="July-2002: Re-released for DXP Platform."
T1: library part NPN_NEW, "NPN Bipolar Transistor", Manuf_1=unisonic, Manuf_Part_1=MMBT9013, Code - JEDEC=TO-226-AA, Published=8-Jun-2000, Publisher="Altium Limited", Revision="July-2002: Re-released for DXP Platform."
U1 U3: "Ultra low drop-low noise BiCMOS voltage, regulators low ESR capacitors compatible", Manuf_1=STM, Provided=ST
  U1: Manuf_Part_1=LD3985M33R
  U3: Manuf_Part_1=LD3985M25R
U2: "Medium-density performance line ARM-based 32-bit MCU with 128KB Flash", Manuf_1=STM, Distrib=ST, ECCN_US/EU=3A991A2/NEC, Manuf_Part_1=STM32F103CBT6, Order=STM32F103CBT6, Provided=ST, Ref St=xxxxxxxx
U4: "STM32 Manta (STM32F407VGT6)", Manuf_1=STM, Distrib=ST, ECCN_US/EU=3A991A2/NEC, Manuf_Part_1=STM32F407VGT6, Provided=ST, Ref St=9175122
U5: library part LIS3DSH_, "MEMS motion sensor 3-axis - ±2g/±4g/±6g/±8g/±16g digital output accelerometer", Manuf_1=STM, Distrib=STM, Manuf_Part_1=LIS3DSHTR, Order=LIS3DSHTR, Provided=ST, Ref St="to be created"
U6: "Enhanced single channel power switches", Manuf_1=STM, Manuf_Part_1=STMPS2141STR, Order=STMPS2141STR, Provided=ST
U7: "Low Power, Stereo DAC w/Headphone & Speaker Amps", Manuf_1=Cirrus, Manuf_Part_1=CS43L22
U8: "2-line IPAD, EMI filter including ESD protection", Manuf_1=STM, Manuf_Part_1=EMIF02-USB03F2, Order=EMIF02-USB03F2, Provided=ST
U9: "MEMS audio sensor omnidirectional digital microphone for industrial applications", Manuf_1=STM, Manuf_Part_1=IMP34DT05TR, Provided=ST, Ref St=9177995
X1 X2: library part XTAL, "Crystal Oscillator", Manuf_1=jfvny, Manuf_Part_1=HC-49S-C20QSA-8.000MHZ, LatestRevisionDate=17-Jul-2002, LatestRevisionNote="Re-released for DXP Platform.", PackageReference=R38, Published=8-Jun-2000, Publisher="Altium Limited"
X3: library part MC306, Fitted=NO
SB1 SB3 SB5 SB7 SB9 SB11 SB12 SB15 SB16 SB18 SB20: Published=24-Mar-1999, Publisher="Altium Limited", Revision="July-2002: Re-released for DXP Platform.", Solder=YES
SB2 SB4 SB6 SB8 SB10 SB13 SB14 SB17 SB19: Published=24-Mar-1999, Publisher="Altium Limited", Revision="July-2002: Re-released for DXP Platform.", Solder=NO

## Free pads (board coordinates)
  round 20 on Mech16: 1(403.98,-1259.28) 1(2303.7,-1265.01)
  round 39.37 smd mask+0: ""(1779.21,3708.9)

## Via types
v1: diameter 23.62, hole 11.81, Top to Bottom, 484 vias
v2: diameter 19.68, hole 11.81, Top to Bottom, 7 vias

## Nets (pads, with @x,y where several pads share a name; then routed paths per layer and width w, separated by ;. In a path a pad name is that pad's centre, name@x,y a point inside that pad or via, vN(x,y) a via of type N, cw(c..) or ccw(c..) an arc to the next point about the centre after c; other vN are vias at no path point)
2V5: C17.1 C18.2 C40.2 C41.2 C53.2 C59.1 U3.5 U7.13 U7.16 U7.34 | length 4352.5
  Top w6.5: C17.1@370.08,2595.98 433.07,2595.98 C18.2@433.07,2590.24 ; 913.14,610.24 928.77,625.87 990.84,625.87 1013.9,648.93 U7.13@1013.9,685.91 ; U7.16@1072.95,685.91 1072.95,644.74 1088.69,629 1092.38,629 ; C41.2@1086.72,990.95 1092.64,990.95 U7.34@1092.64,911.89
  Top w20: C17.1@370.08,2595.98 370.08,2588.58 C18.2@442.91,2588.58 ; C18.2@433.07,2578.74 C18.2@442.91,2588.58 ; U3.5@516.93,2596.46 472.44,2596.46 464.57,2588.58 C18.2@442.91,2588.58 ; C53.2@823.15,610.24 826.77,610.24 913.14,610.24 ; C40.2@1031.63,990.95 1063.11,990.95 ; v1(1063.11,963.73) 1063.11,990.95 ; C41.2@1086.72,990.95 1063.11,990.95 ; 1092.38,629 1138.61,582.77 1138.61,562.36 1141.81,562.36 1149.68,554.49 1149.68,539.62 C59.1@1157.48,533.25
  Top w30: C18.2@433.07,2578.74 452.76,2559.06 500,2559.06 562.18,2496.87 562.18,2337.87 590.55,2309.5 827.01,2309.5 850.62,2285.89 v1(850.62,2254.41) v1(850.62,2230.8) ; C53.2@826.77,610.24 826.77,562.99 v1(827.01,530.88) v1(858.49,530.88) ; v1(1118.2,554.49) 1119.87,533.25 C59.1@1157.48,533.25
  Bottom w25: 771.92,900.77 882.1,900.77 913.58,932.25 1031.63,932.25 v1@1059.18,959.79 ; v1(1063.11,963.73) v1@1059.18,959.79 ; v1(1094.59,963.73) 1094.59,959.79 v1@1059.18,959.79 ; v1(1118.2,523.01) 1118.11,523.01 1118.13,530.88 v1(1118.2,554.49)
  Bottom w30: v1(850.62,2254.41) v1(850.62,2230.8) 850.62,2191.45 976.54,2065.53 976.54,1672.03 992.28,1656.29 992.28,1610.9 1023.21,1580.9 1023.21,1379.19 771.92,1127.9 771.92,900.77 771.92,539.37 779.79,531.5 v1(827.01,530.88) v1(858.49,530.88) 1118.13,530.88 1118.2,530.88 v1(1118.2,554.49)